# EAGLE board ruido_v3 (EAGLE 5.06)
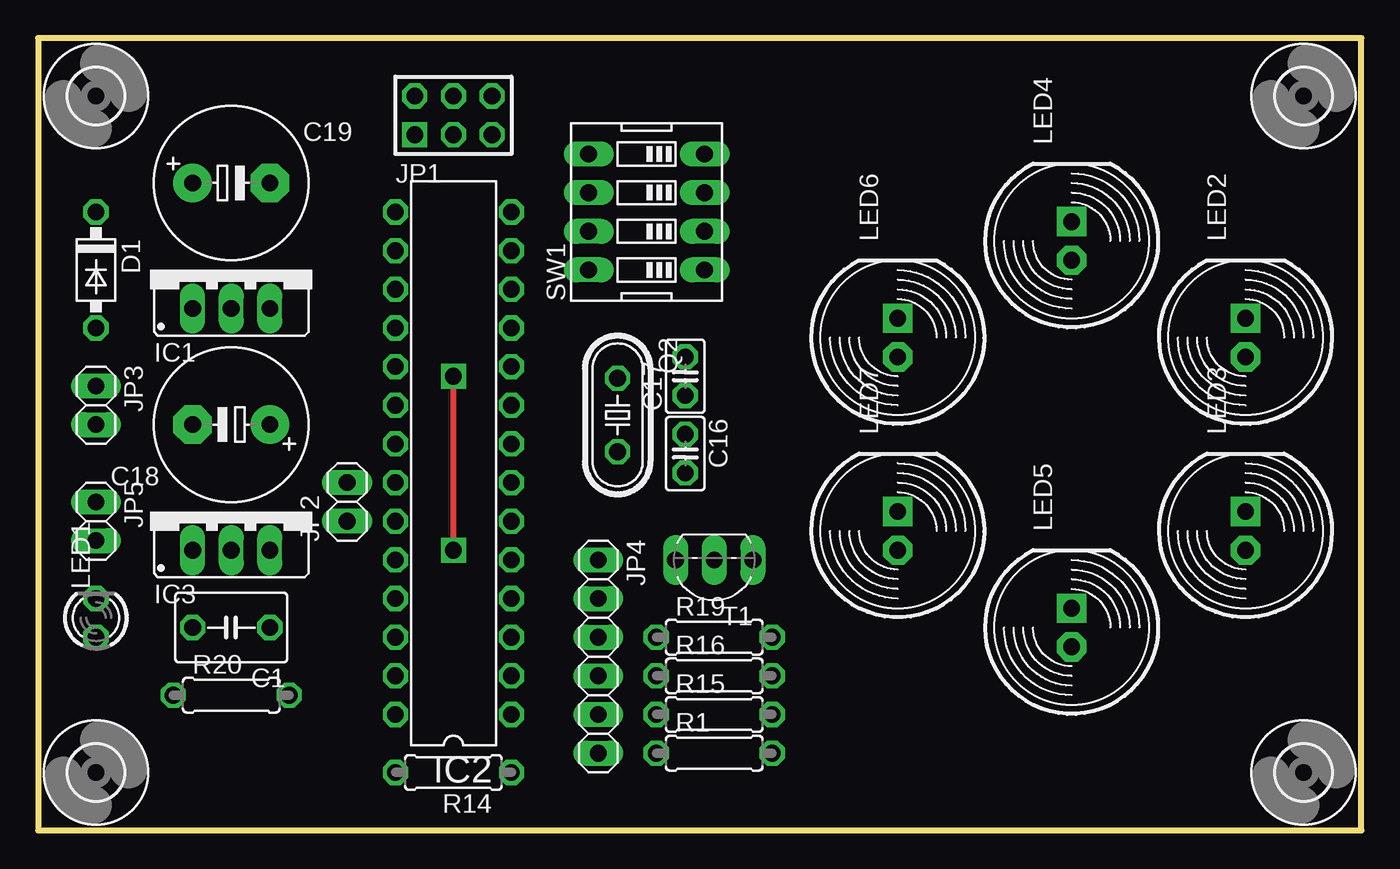
[diagram p0: board, top side]
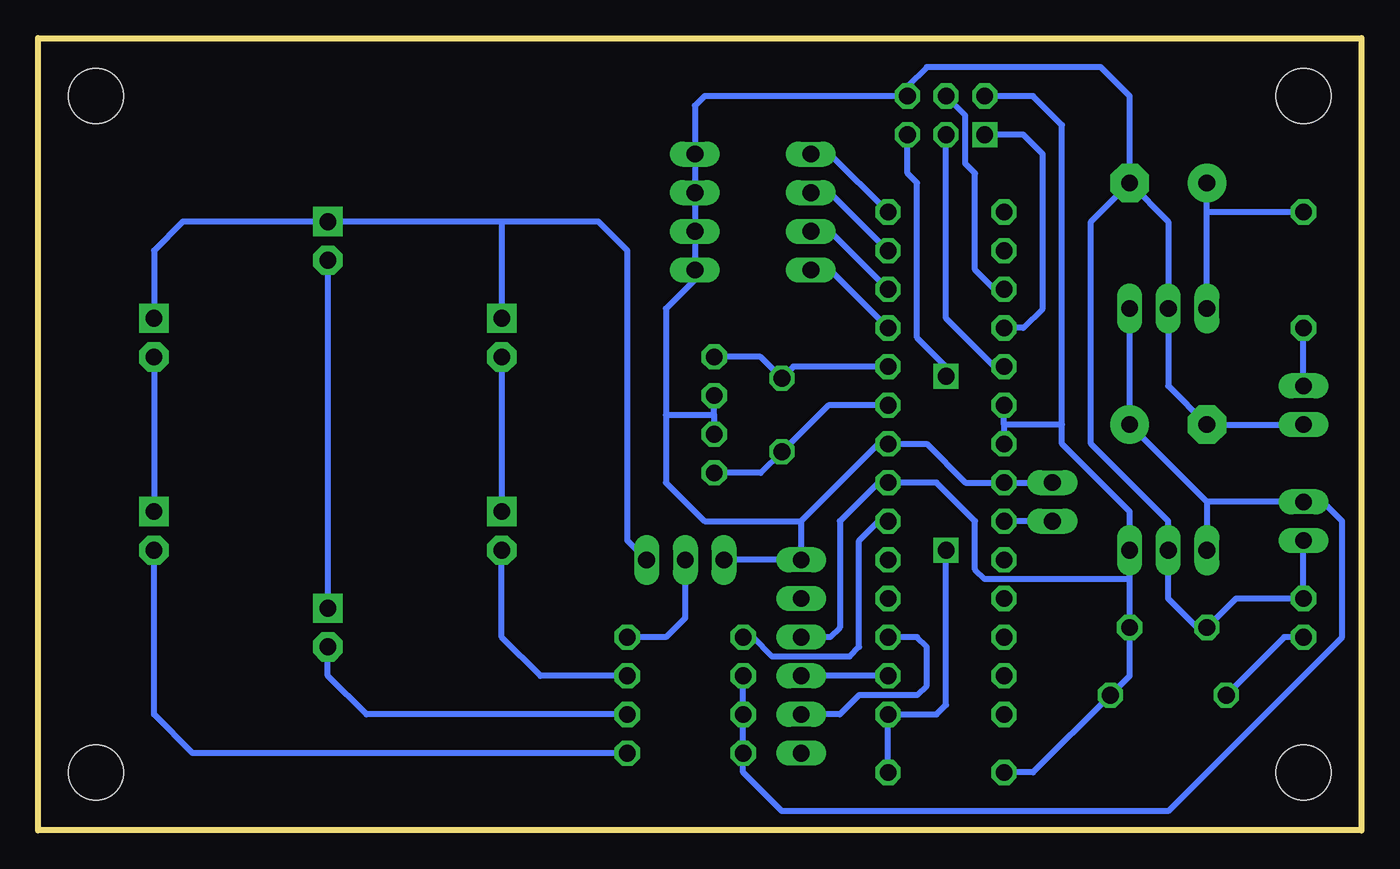
[diagram p1: board, bottom side, seen from below]

Size 87 x 52.07 mm. Coordinates in mm from the lower left corner, seen from the top.
Outline: 0,0 87,0 87,52.07 0,52.07 0,0
Copper layers (1*16): Top 0.035mm / dielectric 1.5mm / Bottom 0.035mm
Design rules "default": minimum track width 10mil, minimum drill 24mil, track to track 8mil, track to pad 8mil, pad to pad 8mil, via to via 8mil, smd to smd 8mil, copper to edge 40mil, drill to drill 8mil, minimum pad ring 10mil, minimum via ring 8mil, stop-mask expansion 4mil, vias tented up to drill 0mil, thermal gap 10mil

## Footprints (pad centres in the part's own frame; a part is rotated, then mirrored left to right if it is on the bottom)
C050-045X075 = drill 1.1 octagon: 1 -2.54,0; 2 2.54,0
C025-025X050 = drill 1.1 octagon: 1 -1.27,0; 2 1.27,0
E5-10,5 = drill 1.1 pad 2.54 round: + -2.54,0 | drill 1.1 pad 2.54 octagon: - 2.54,0
DO41-7 = drill 1.1 octagon: A 3.81,0; C -3.81,0
78XXS = drill 1.1 long: GND 0,-2.54; IN -2.54,-2.54; OUT 2.54,-2.54
DIL28-3 = drill 1.1 octagon: 1 -16.51,-3.81; 2 -13.97,-3.81; 3 -11.43,-3.81; 4 -8.89,-3.81; 5 -6.35,-3.81; 6 -3.81,-3.81; 7 -1.27,-3.81; 8 1.27,-3.81; 9 3.81,-3.81; 10 6.35,-3.81; 11 8.89,-3.81; 12 11.43,-3.81; 13 13.97,-3.81; 14 16.51,-3.81; 15 16.51,3.81; 16 13.97,3.81; 17 11.43,3.81; 18 8.89,3.81; 19 6.35,3.81; 20 3.81,3.81; 21 1.27,3.81; 22 -1.27,3.81; 23 -3.81,3.81; 24 -6.35,3.81; 25 -8.89,3.81; 26 -11.43,3.81; 27 -13.97,3.81; 28 -16.51,3.81
AVR-ISP-6 = drill 1.1 square: 1 -2.54,-1.27 | drill 1.1 octagon: 2 -2.54,1.27; 3 0,-1.27; 4 0,1.27; 5 2.54,-1.27; 6 2.54,1.27
1X02 = drill 1.1 long: 1 -1.27,0; 2 1.27,0
1X06 = drill 1.1 long: 1 -6.35,0; 2 -3.81,0; 3 -1.27,0; 4 1.27,0; 5 3.81,0; 6 6.35,0
LED3MM = drill 1.1 octagon: A -1.27,0; K 1.27,0
LED10MM = drill 1.1 pad 1.93 octagon: A -1.27,0 | drill 1.1 pad 1.93 square: K 1.27,0
HC49/S = drill 1.1 octagon: 1 -2.413,0; 2 2.413,0
0207/7 = drill 1.1 octagon: 1 -3.81,0; 2 3.81,0
EDG-04 = drill 1.1 long: 1 -3.81,-3.81; 2 -1.27,-3.81; 3 1.27,-3.81; 4 3.81,-3.81; 5 3.81,3.81; 6 1.27,3.81; 7 -1.27,3.81; 8 -3.81,3.81
TO92- = drill 1.1 long: 1 2.54,0; 2 0,0; 3 -2.54,0
3,6 = hole 3.6: 0,0

## Placement (x,y rotation side)
C1  100nF  [C050-045X075]  12.7,13.34 180 top
C16  0.1uF  [C025-025X050]  42.55,24.77 270 top
C17  0.1uF  [C025-025X050]  42.55,29.84 90 top
C18  220uF/16V  [E5-10,5]  12.7,26.67 180 top
C19  220uF/16V  [E5-10,5]  12.7,42.55 0 top
D1  1N4001  [DO41-7]  3.81,36.83 270 top
IC1  7809  [78XXS]  12.7,36.83 0 top
IC2  MEGA8-P  [DIL28-3]  27.3,24.13 90 top
IC3  7805  [78XXS]  12.7,20.95 0 top
JP1  AVR-ISP-6  [AVR-ISP-6]  27.3,46.99 0 top
JP2  [1X02]  20.32,21.59 90 top
JP3  [1X02]  3.81,27.94 270 top
JP4  [1X06]  36.83,11.43 270 top
JP5  [1X02]  3.81,20.32 270 top
LED1  [LED3MM]  3.81,13.97 90 top
LED2  [LED10MM]  79.38,32.38 90 top
LED3  [LED10MM]  79.38,19.68 90 top
LED4  [LED10MM]  67.94,38.73 90 top
LED5  [LED10MM]  67.94,13.34 90 top
LED6  [LED10MM]  56.52,32.38 90 top
LED7  [LED10MM]  56.52,19.68 90 top
Q2  [HC49/S]  38.1,27.3 270 top
R1  470  [0207/7]  44.45,5.08 0 top
R14  10 K  [0207/7]  27.3,3.81 180 top
R15  470  [0207/7]  44.45,7.62 0 top
R16  470  [0207/7]  44.45,10.16 0 top
R19  1k  [0207/7]  44.45,12.7 0 top
R20  1 K  [0207/7]  12.7,8.89 0 top
SW1  [EDG-04]  40.01,40.64 90 top
T1  BC547  [TO92-]  44.45,17.78 180 top
U$2  [3,6]  3.81,3.81 0 top
U$3  [3,6]  83.19,3.81 0 top
U$4  [3,6]  83.19,48.26 0 top
U$5  [3,6]  3.81,48.26 0 top

## Library data of the parts
C1 C16-C19 D1 IC1-IC3 JP1-JP5 LED1-LED7 Q2 R1 R14-R16 R19 R20 SW1 T1 U$2-U$5 = ruido

## Nets
+5V: C1.1 IC2.7 IC2.20 IC2.21 IC3.OUT JP1.2 JP4.3 R14.2 R20.2
+12V: C18.+ IC1.OUT IC3.IN JP5.1 R1.1 R15.1 R16.1
GND: C1.2 C16.1 C17.1 C18.- C19.- IC1.GND IC2.8 IC2.22 IC3.GND JP1.6 JP2.2 JP3.2 JP4.1 JP5.2 LED1.K SW1.1 SW1.2 SW1.3 SW1.4 T1.1
MISO: IC2.18 JP1.1
MOSI: IC2.17 JP1.4
N$1: C19.+ D1.C IC1.IN
N$2: LED2.A LED3.K
N$3: LED3.A R1.2
N$4: LED2.K LED4.K LED6.K T1.3
N$11: R19.2 T1.2
N$15: IC2.14 SW1.5
N$18: C16.2 IC2.9 Q2.2
N$19: C17.2 IC2.10 Q2.1
N$20: LED6.A LED7.K
N$21: LED4.A LED5.K
N$22: IC2.13 SW1.6
N$23: IC2.12 SW1.7
N$24: IC2.11 SW1.8
N$25: LED5.A R15.2
N$26: LED7.A R16.2
N$30: LED1.A R20.1
N$37: D1.A JP3.1
PWM: IC2.6 R19.1
RST: IC2.1 JP1.5 R14.1
RXD: IC2.2 JP4.4
SCK: IC2.19 JP1.3
SIG: IC2.23 JP2.1
TXD: IC2.3 JP4.5

## Tracks (layer width: path | path; a pad name or v marks a point on that pad's centre or on a via)
+5V
  Bottom 0.406: 15.24,16.51 C1.1 15.24,10.16 R20.2 21.59,3.81 R14.2 | 15.24,16.51 IC3.OUT 15.24,20.95 19.68,25.4 19.68,26.67 | 23.5,26.67 IC2.21 | 23.5,26.67 IC2.20 | 19.68,26.67 23.5,26.67 | 19.68,26.67 19.68,46.35 21.59,48.26 JP1.2 | JP4.3 34.92,12.7 34.29,13.34 34.29,20.32 31.75,22.86 IC2.7 27.94,22.86 25.4,20.32 25.4,17.14 24.77,16.51 15.24,16.51
+12V
  Bottom 0.406: IC1.OUT C18.+ 10.16,21.59 | 10.16,21.59 JP5.1 2.54,21.59 1.27,20.32 1.27,12.7 12.7,1.27 38.1,1.27 40.64,3.81 R1.1 R15.1 R16.1 | 10.16,21.59 IC3.IN
GND
  Bottom 0.406: JP3.2 C18.- 12.7,29.21 IC1.GND 12.7,40.01 C19.- | 42.55,27.3 C16.1 | 42.55,27.3 C17.1 | 45.72,27.3 42.55,27.3 | 45.72,27.3 45.72,22.86 43.18,20.32 36.83,20.32 | JP5.2 LED1.K 8.26,15.24 C1.2 10.79,13.34 12.7,15.24 IC3.GND 12.7,20.32 17.78,25.4 17.78,40.01 C19.- | JP2.2 IC2.22 26.04,22.86 28.57,25.4 IC2.8 31.75,25.4 36.83,20.32 | C19.- 15.24,48.26 17.14,50.16 28.57,50.16 29.84,48.9 JP1.6 43.18,48.26 43.81,47.62 SW1.4 SW1.3 SW1.2 SW1.1 43.81,36.2 45.72,34.29 45.72,27.3 | 36.83,20.32 JP4.1 T1.1
MISO
  Bottom 0.406: IC2.18 22.23,33.02 20.95,34.29 20.95,44.45 22.23,45.72 JP1.1
MOSI
  Bottom 0.406: JP1.4 26.04,46.99 26.04,43.81 25.4,43.18 25.4,36.83 24.13,35.56 IC2.17
N$1
  Bottom 0.406: IC1.IN 10.16,40.64 | 10.16,40.64 C19.+ | 10.16,40.64 D1.C
N$2
  Bottom 0.406: LED2.A LED3.K
N$3
  Bottom 0.406: R1.2 76.83,5.08 79.38,7.62 LED3.A
N$4
  Bottom 0.406: T1.3 48.26,19.05 48.26,38.1 50.16,40.01 56.52,40.01 | 56.52,40.01 LED4.K 77.47,40.01 79.38,38.1 LED2.K | 56.52,40.01 LED6.K
N$11
  Bottom 0.406: T1.2 44.45,13.97 45.72,12.7 R19.2
N$15
  Bottom 0.406: IC2.14 34.92,44.45 SW1.5
N$18
  Bottom 0.406: C16.2 39.5,23.5 Q2.2 35.05,27.94 IC2.9
N$19
  Bottom 0.406: IC2.10 37.34,30.48 Q2.1 39.5,31.11 C17.2
N$20
  Bottom 0.406: LED6.A LED7.K
N$21
  Bottom 0.406: LED4.A LED5.K
N$22
  Bottom 0.406: IC2.13 34.92,41.91 SW1.6
N$23
  Bottom 0.406: IC2.12 34.92,39.37 SW1.7
N$24
  Bottom 0.406: IC2.11 34.92,36.83 SW1.8
N$25
  Bottom 0.406: R15.2 65.41,7.62 67.94,10.16 LED5.A
N$26
  Bottom 0.406: R16.2 53.98,10.16 56.52,12.7 LED7.A
N$30
  Bottom 0.406: LED1.A 5.08,12.7 R20.1
N$37
  Bottom 0.406: JP3.1 D1.A
PWM
  Bottom 0.406: R19.1 40.01,12.7 38.73,11.43 33.66,11.43 33.02,12.06 33.02,19.05 31.75,20.32 IC2.6
RST  (via drill 1.1)
  Top 0.406: v27.3,18.41 v27.3,29.84
  Bottom 0.406: R14.1 IC2.1 27.94,7.62 27.3,8.26 v27.3,18.41 | v27.3,29.84 27.3,30.48 29.21,32.38 29.21,42.55 29.84,43.18 JP1.5
RXD
  Bottom 0.406: IC2.2 JP4.4
SCK
  Bottom 0.406: IC2.19 24.13,30.48 27.3,33.66 JP1.3
SIG
  Bottom 0.406: JP2.1 IC2.23
TXD
  Bottom 0.406: JP4.5 34.29,7.62 33.02,8.89 29.21,8.89 28.57,9.53 28.57,12.06 29.21,12.7 IC2.3